# Altium PCB PCB4.PcbDoc (part 2 of 2)
Units mil, origin at the board's own origin, x right, y up, seen from the top; angles counter-clockwise.
Board outline 6000 x 4000 mil, 2 copper layers (Top Layer, Bottom Layer); 67 components, 41 nets, 192 pads, 16 vias.
Unrouted connection lines stored in the file: 1.
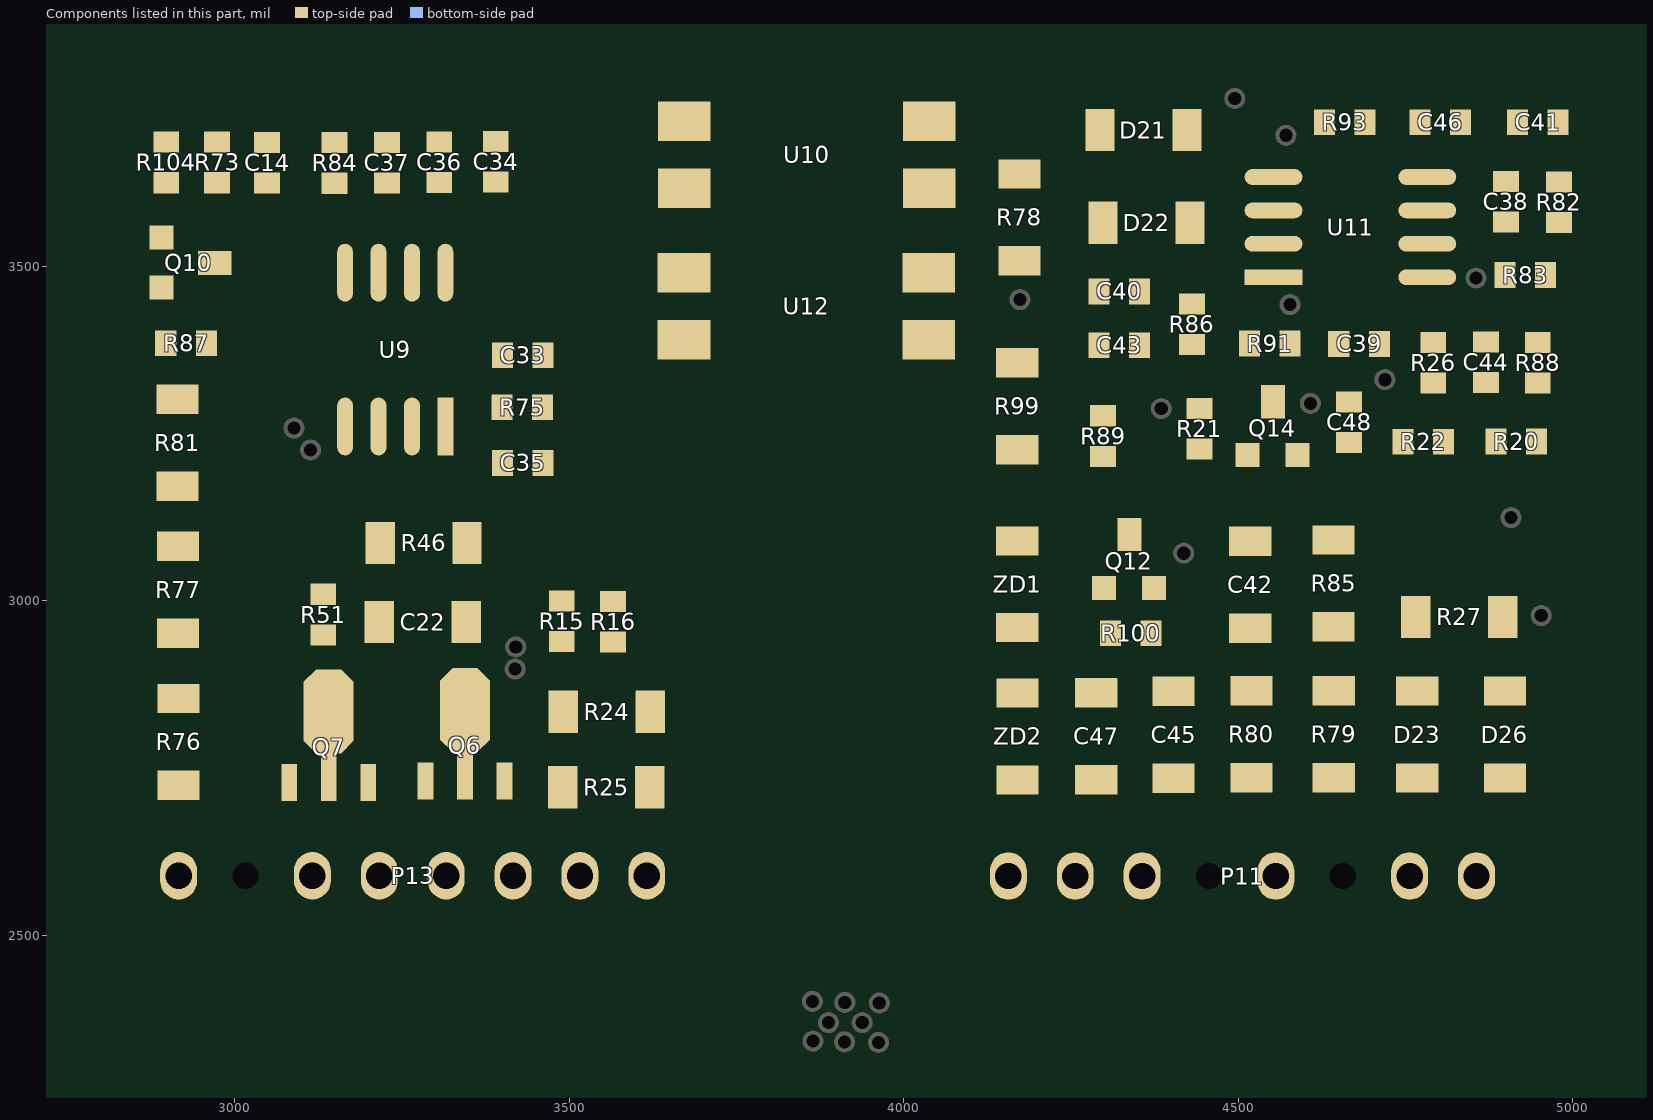
[diagram p2: the components of this part, seen from the top]

## Via types
v1: diameter 19.68, hole 11.81, Top Layer to Bottom Layer, 16 vias

## Nets (pads, with @x,y where several pads share a name; then routed paths per layer and width w, separated by ;. In a path a pad name is that pad's centre, name@x,y a point inside that pad or via, vN(x,y) a via of type N, cw(c..) or ccw(c..) an arc to the next point about the centre after c; other vN are vias at no path point) (continued)
copper on no net: | length 70062.8
  Top Layer w13.78: 4011.89,3376.42 4053.62,3334.68 4053.62,3333.5 ; 4026.46,3396.89 4033.94,3396.89 4060.71,3370.12 4060.71,3336.26 ; 4028.03,3387.83 4060.71,3355.16 4060.71,3179.96 4148.11,3092.56 4165.83,3092.56 ; 4028.43,3370.51 4050.87,3348.07 4050.87,3178.39 4145.35,3083.9 4168.19,3083.9 ; 4059.13,3317.76 4059.13,3353.98 4068.98,3363.82 ; 4218.98,3156.73 4302.44,3156.73 4341.42,3117.76 4341.42,3092.95 4339.45,3090.98 4339.45,3098.46 4282.36,3155.55 ; 4242.6,3529.96 4243.39,3529.96 4254.8,3541.38 4282.36,3541.38 4299.69,3558.7 4299.69,3565.39 ; 4264.25,3549.65 4272.91,3549.65 4274.49,3551.22 ; 4278.43,3567.36 4242.2,3531.14 4242.2,3314.21 4217.01,3289.02 4112.68,3289.02 4097.32,3273.66 4097.32,3184.68 4125.28,3156.73 4287.48,3156.73 4331.18,3113.03 4331.18,3112.64 ; 4288.27,3155.55 4289.45,3156.73 4307.95,3156.73 4343.78,3120.91 ; 4291.81,3467.36 4291.81,3471.3 4361.1,3540.59 4361.1,3609.88 4383.94,3632.72 4460.71,3632.72 4513.07,3580.35 4538.66,3580.35 4541.81,3583.5 4541.81,3584.68 4539.45,3587.05 4505.98,3587.05 ; 4303.23,3140.2 4313.86,3129.57 4313.86,3085.87 4318.19,3081.54 ; 4651.26,3448.86 4651.26,3578.39 4660.71,3587.83 4660.71,3444.92 4662.68,3442.95 4647.32,3442.95 4639.06,3451.22 4639.06,3576.42 4708.35,3645.71 4710.32,3645.71 4720.16,3635.87 4744.96,3635.87 4749.29,3640.2 4722.52,3640.2 4711.89,3650.83 4805.2,3650.83 4805.98,3650.04 4723.7,3650.04 4670.16,3596.5 4670.16,3447.68 4719.37,3398.46 4719.37,3391.77 ; 4681.97,3703.58 4681.97,3685.87 4681.18,3685.08 4687.09,3685.08 4706.38,3704.37 4765.83,3704.37 4771.34,3709.88 4771.34,3726.42 4771.73,3726.81 4696.54,3726.81 4689.84,3720.12 4689.84,3715.39 ; 4703.23,3350.43 4703.23,3406.73 4677.64,3432.32 4646.54,3432.32 4633.15,3445.71 4633.15,3585.87 4709.53,3662.24 4807.17,3662.24 4826.06,3681.14 4826.06,3730.35 4828.03,3732.32 4925.67,3732.32 4926.06,3731.93 4926.06,3688.23 4922.13,3684.29 4871.34,3684.29 4816.61,3629.57 4722.91,3629.57 4682.36,3589.02 4682.36,3447.68 4738.66,3391.38 4748.11,3391.38 ; 4773.31,3534.68 4835.51,3534.68 4857.95,3557.13 4857.95,3599.65 4889.06,3630.75 ; 4787.09,3583.5 4726.85,3583.5 4709.53,3566.18 4709.53,3464.21 4736.69,3437.05 4920.55,3437.05 4958.35,3399.25 4958.35,3387.83 ; 4789.84,3325.63 4790.63,3325.63 4831.18,3285.08 4908.35,3285.08 4945.35,3322.09 4950.87,3322.09 4951.65,3321.3 4951.65,3248.07 4948.9,3245.31 4944.57,3245.31 4939.84,3250.04 4939.84,3261.06 4915.83,3285.08 4893.78,3285.08 ; 4825.67,3654.76 4865.83,3694.92 4917.01,3694.92 4909.13,3702.8 4845.75,3702.8 4843.78,3700.83 4843.78,3684.68 4855.59,3696.5 4855.59,3700.43 4850.47,3705.55 4850.47,3726.81 4850.87,3726.42 4903.62,3726.42 ; 4871.73,3329.17 4882.76,3329.17 4933.15,3379.57 ; 4878.82,3618.94 4971.34,3618.94 4978.82,3626.42 4979.21,3626.42 ; 4916.22,3285.08 4931.57,3285.08 4937.09,3279.57 4937.09,3172.48 4913.86,3149.25 4892.99,3149.25 4891.02,3147.28 4891.02,3115 4896.54,3109.49 4947.72,3109.49 4953.62,3115.39 4953.62,3231.54 ; 4921.73,3287.44 4921.73,3289.41 4941.02,3308.7 4941.02,3271.3 4939.06,3273.27 4939.06,3274.84 4928.03,3285.87 4929.61,3285.87 4934.33,3290.59 ; 4935.91,3380.75 4935.91,3420.12 ; 4941.02,3137.05 4947.32,3130.75 4947.32,3119.33 4935.51,3131.14 4912.68,3131.14 4909.92,3133.9 4928.43,3133.9 4942.2,3147.68 4907.56,3147.68 4898.9,3139.02 4898.9,3124.45 4903.62,3119.72 4937.87,3119.72 4947.72,3129.57 4947.72,3161.46 ; 4941.81,3405.94 4944.57,3403.19 4944.57,3393.35
  Top Layer w19.68: 2857.95,3548.86 2856.77,3548.86 2848.5,3557.13 2848.5,3625.24 2852.05,3628.78 2890.24,3628.78 ; 2875.67,3537.05 2852.44,3537.05 2848.5,3540.98 2848.5,3595.71 2861.89,3609.09 2868.19,3609.09 2877.24,3600.04 2877.24,3563.43 2885.12,3555.55 2885.12,3609.09 2881.97,3612.24 2896.14,3612.24 2902.83,3605.55 2873.31,3605.55 2865.04,3613.82 2865.04,3558.31 2874.09,3549.25 2889.84,3549.25 2896.14,3542.95 2896.14,3585.87 2930,3619.72 2969.37,3619.72 2976.06,3626.42 2978.43,3626.42 2852.44,3626.42 2848.9,3622.87 2848.9,3555.16 2860.71,3543.35 2885.12,3543.35 ; 2877.64,3725.24 2877.64,3703.58 2887.87,3693.35 2861.89,3693.35 2861.5,3693.74 2861.5,3737.05 2859.92,3738.62 2892.6,3738.62 2892.99,3739.02 2892.99,3708.31 2896.54,3704.76 2896.54,3688.23 2890.24,3681.93 2849.29,3681.93 2844.96,3686.26 2844.96,3740.98 2856.38,3752.4 2902.05,3752.4 2909.13,3745.31 2909.13,3691.38 2901.65,3683.9 2894.57,3683.9 ; 2879.61,3600.43 2907.56,3628.39 3048.9,3628.39 3048.5,3628.39 3041.02,3620.91 2980.79,3620.91 ; 2908.35,3312.24 2908.35,3305.16 2921.73,3291.77 2954.8,3291.77 2983.15,3320.12 2983.15,3503.19 2979.61,3499.65 2979.61,3338.62 2945.75,3304.76 2945.75,3318.15 2951.26,3323.66 2951.26,3325.63 2970.16,3344.53 2970.16,3487.83 ; 2910.71,2715.79 2909.13,2715.79 2896.93,2703.58 2896.93,2559.88 2899.29,2557.52 2928.03,2557.52 2935.51,2565 2935.51,2704.76 2922.13,2718.15 2915.04,2718.15 2915.43,2717.76 2915.43,2612.64 2918.58,2609.49 2918.58,2613.43 2920.55,2615.39 2920.55,2717.36 ; 2911.1,3099.65 2917.4,3105.94 2917.4,3155.55 2922.13,3160.28 2925.28,3160.28 2929.21,3156.34 2929.21,3091.77 2919.37,3101.61 2919.37,3170.91 2918.19,3169.72 2905.98,3169.72 2898.11,3161.85 2898.11,3094.92 2917.8,3075.24 2924.09,3075.24 ; 2915.04,2927.99 2915.04,2875.63 2931.97,2858.7 ; 2924.49,2852.8 2911.89,2852.8 2900.47,2864.21 2900.47,2943.74 2901.26,2942.95 2918.58,2942.95 2931.97,2929.57 ; 2956.38,3501.61 2956.38,3383.11 2957.56,3381.93 ; 3040.24,2795.71 3040.24,2789.8 3081.97,2748.07 ; 3040.63,2895.71 3040.63,2798.46 3033.94,2791.77 3033.94,2720.12 3042.99,2711.06 3072.91,2711.06 3047.32,2736.65 3047.32,2745.31 3050.08,2742.56 3050.08,2724.84 ; 3046.93,3379.17 3066.61,3359.49 3215.43,3359.49 3213.86,3357.91 3044.17,3357.91 3057.56,3371.3 3145.35,3371.3 3056.77,3459.88 3062.68,3453.98 3062.68,3431.54 3110.32,3383.9 3091.81,3383.9 3052.05,3423.66 3088.66,3423.66 3127.64,3384.68 3076.85,3384.68 3058.35,3403.19 3058.35,3405.16 3059.13,3404.37 3059.13,3387.05 3063.46,3382.72 ; 3047.32,3693.35 3065.04,3693.35 3094.57,3663.82 3094.57,3575.24 3034.72,3515.39 3034.72,3276.81 3057.17,3254.37 3067.8,3254.37 3126.46,3195.71 3126.46,3183.5 ; 3063.46,3551.61 3098.9,3516.18 3098.9,3436.26 3086.69,3448.46 3086.69,3508.31 3081.57,3513.43 ; 3064.25,3382.32 3064.25,3383.9 3052.83,3395.31 3052.83,3518.15 3086.3,3551.61 3086.3,3539.02 3067.8,3520.51 3067.8,3462.64 3080,3474.84 3080,3501.22 ; 3069.37,3468.94 3164.25,3374.06 3286.69,3374.06 3306.38,3393.74 3306.38,3408.7 3309.92,3412.24 3332.76,3412.24 3363.46,3442.95 3363.46,3498.07 3382.36,3516.97 3698.9,3516.97 3696.93,3515 3696.93,3505.55 3661.89,3470.51 3554.02,3470.51 3526.85,3443.35 3526.85,3211.46 3519.37,3203.98 3464.25,3203.98 3458.35,3209.88 3458.35,3402.4 3440.24,3420.51 3361.5,3420.51 3345.75,3404.76 3345.75,3343.74 3340.24,3338.23 3195.35,3338.23 3166.22,3309.09 3166.22,3266.57 ; 3073.31,3097.28 3073.31,3085.08 3059.53,3071.3 3070.16,3071.3 3090.24,3091.38 3090.24,3088.23 3053.23,3051.22 3053.23,3196.1 3055.59,3198.46 3055.59,3128.78 3099.29,3085.08 3099.29,3080.35 3044.96,3026.02 3044.96,3210.28 3063.86,3229.17 3080.79,3229.17 ; 3079.61,3214.61 3079.61,3114.61 3089.84,3104.37 3108.74,3104.37 3146.54,3142.17 3146.54,3208.31 3148.9,3210.67 3092.2,3210.67 3095.35,3207.52 3095.35,3116.18 3129.21,3150.04 3129.21,3204.76 3109.92,3185.47 3109.92,3136.26 3112.68,3139.02 3112.68,3211.06 ; 3080,2728.78 3080,2731.14 3033.94,2777.2 3033.94,2942.17 3198.11,3106.34 3208.35,3106.34 3212.28,3102.4 3212.28,3101.61 3129.21,3018.54 ; 3093.78,3585.47 3034.72,3526.42 3034.72,3396.1 3079.21,3351.61 3098.9,3351.61 ; 3096.14,3348.07 3089.84,3348.07 3034.72,3292.95 3034.72,3240.2 ; 3102.05,3321.3 3034.72,3253.98 3034.72,2998.86 3166.22,3130.35 3166.22,3159.88 ; 3103.23,3215.39 3115.83,3215.39 ; 3105.98,3377.2 3102.83,3380.35 3102.83,3664.61 3130,3691.77 3142.6,3691.77 3142.2,3691.38 3154.8,3691.38 ; 3106.38,2620.91 3106.38,2645.31 3126.46,2665.39 3126.46,2621.3 3111.5,2606.34 3112.28,2606.34 ; 3116.22,2806.73 3116.22,2800.43 3133.94,2782.72 3133.94,2686.65 3095.35,2648.07 3095.35,2556.73 3097.32,2554.76 3133.94,2554.76 3134.72,2555.55 3134.72,2659.88 3146.14,2671.3 3146.14,2800.04 3145.35,2800.83 ; 3117.4,3361.46 3100.87,3377.99 3100.87,3668.54 3146.54,3714.21 3190.24,3714.21 ; 3125.67,2565.79 3125.67,2624.06 3146.14,2644.53 3146.14,2717.36 3141.42,2722.09 ; 3139.06,2724.06 3139.06,2761.85 3089.84,2811.06 3089.84,2936.26 3107.17,2953.58 3173.7,2953.58 3200.87,2980.75 3202.44,2980.75 3227.64,2955.55 3227.64,2851.22 3141.02,2764.61 3141.02,2759.09 ; 3146.93,3622.87 3163.86,3605.94 3163.86,3486.26 ; 3160.32,3274.84 3160.32,3261.85 3166.61,3255.55 3166.61,3220.91 3165.83,3220.12 3054.8,3220.12 3034.72,3240.2 ; 3166.22,3270.51 3166.22,3140.59 3118.98,3093.35 3070.95,3093.35 3070.95,3203.98 3034.72,3240.2 ; 3181.18,3066.57 3201.26,3066.57 3209.92,3075.24 3209.92,3082.32 ; 3194.17,2703.98 3230.39,2667.76 3375.28,2667.76 3397.32,2689.8 3397.32,2748.46 3412.28,2748.46 3420.16,2740.59 3420.16,2738.62 ; 3200.47,2734.68 3200.47,2715.79 3250.87,2665.39 3382.36,2665.39 3424.09,2707.13 3424.09,2744.53 3420.95,2747.68 3413.86,2747.68 ; 3212.68,2587.44 3223.31,2587.44 3236.3,2600.43 3236.3,2634.69 3264.65,2663.03 3241.81,2663.03 3226.85,2648.07 ; 3214.25,3270.12 3214.25,3214.61 3339.06,3089.8 ; 3215.04,3418.54 3215.04,3614.21 3226.85,3626.02 3228.03,3626.02 ; 3215.04,3478.39 3215.04,3596.1 3233.15,3614.21 ; 3216.22,2582.72 3205.98,2582.72 3196.54,2592.17 3196.54,2744.92 3206.77,2744.92 3207.17,2744.53 3207.17,2666.97 3236.3,2637.83 3236.3,2563.03 3228.03,2554.76 3197.32,2554.76 3196.54,2555.55 3196.54,2644.92 3207.95,2656.34 3207.95,2626.81 3223.7,2611.06 3223.7,2633.9 3217.8,2639.8 ; 3254.02,2764.21 3264.25,2753.98 3264.25,2716.97 3268.19,2713.03 3273.31,2713.03 ; 3254.02,2765.39 3284.72,2734.68 3284.72,2726.02 ; 3263.07,3245.31 3263.07,3215 3305.59,3172.48 3362.28,3172.48 3383.94,3194.13 3387.48,3194.13 3374.49,3181.14 3326.46,3181.14 3320.95,3175.63 3395.35,3175.63 3397.32,3177.6 3397.32,3195.71 ; 3264.25,3420.51 3264.25,3563.43 3311.89,3611.06 3311.89,3620.51 ; 3265.04,3417.76 3265.04,3564.21 3308.35,3607.52 3308.35,3618.94 3302.44,3624.84 3298.5,3624.84 3296.54,3622.87 3296.54,3599.25 ; 3267.01,3259.09 3267.01,3210.67 3292.6,3185.08 3354.8,3185.08 3385.91,3216.18 3406.38,3216.18 3406.77,3215.79 3406.77,3018.54 3359.53,2971.3 3391.81,2971.3 3405.59,2985.08 3405.59,3146.1 3390.24,3161.46 3316.22,3161.46 3282.36,3195.31 ; 3296.93,2820.91 3296.93,2891.77 3339.84,2934.68 3344.96,2934.68 3308.74,2898.46 3308.74,2812.24 3312.68,2808.31 3312.68,2804.76 ; 3305.98,2898.46 3313.86,2898.46 3329.21,2913.82 3329.21,2985.47 3331.97,2988.23 3409.53,2988.23 3454.41,2943.35 3491.42,2943.35 ; 3313.46,3470.91 3313.46,3528.78 3382.76,3598.07 3382.76,3616.57 ; 3313.86,3496.89 3313.86,3528.78 3394.96,3609.88 3628.03,3609.88 3640.24,3597.68 ; 3315.83,3256.73 3315.83,3287.05 3328.82,3300.04 3368.98,3300.04 3395.75,3326.81 3395.75,3372.09 3402.05,3372.09 3404.02,3370.12 3404.02,3290.98 3396.54,3283.5 3366.61,3283.5 3344.96,3261.85 3344.96,3233.5 3339.06,3227.6 3318.58,3227.6 3315.43,3230.75 3315.43,3251.22 3313.07,3253.58 3313.07,3296.89 3316.22,3300.04 3385.91,3300.04 3394.57,3308.7 ; 3316.22,3476.02 3316.22,3531.14 3413.86,3628.78 3674.49,3628.78 3673.7,3629.57 3402.44,3629.57 ; 3318.58,2802.8 3318.58,2794.13 3338.27,2774.45 3338.27,2709.88 3339.84,2708.31 3348.9,2708.31 3348.9,2765.39 3433.54,2850.04 3433.54,2885.47 3459.92,2911.85 3487.09,2911.85 3495.35,2920.12 3495.35,2933.5 ; 3325.67,3373.27 3325.67,3381.93 3370.16,3426.42 ; 3338.27,2950.43 3288.66,2900.83 3288.66,2816.18 3342.99,2761.85 3342.99,2727.2 ; 3342.99,3278.39 3342.99,3250.04 3329.61,3236.65 3329.61,3291.77 3330,3292.17 3359.13,3292.17 ; 3364.25,3438.62 3364.25,3523.27 3405.2,3564.21 3578.82,3564.21 3643.39,3499.65 3651.65,3499.65 ; 3376.46,2824.84 3376.46,2830.35 3404.41,2858.31 3404.41,2883.11 3403.62,2882.32 3374.09,2882.32 3384.33,2872.09 3384.33,2847.68 3392.6,2855.94 3392.6,2871.3 ; 3378.03,2813.43 3378.82,2813.43 3417.8,2852.4 3417.8,2881.54 3462.68,2926.42 3480.79,2926.42 3476.85,2930.35 3468.19,2930.35 3467.8,2929.96 3354.02,2929.96 3319.37,2895.31 3423.31,2895.31 3450.47,2922.48 3338.66,2922.48 3328.03,2911.85 3335.12,2911.85 3335.51,2912.24 3422.13,2912.24 ; 3402.44,3181.54 3434.33,3149.65 3434.33,2968.15 3470.16,2932.32 3481.18,2932.32 ; 3403.23,2955.55 3405.98,2955.55 3410.32,2951.22 3371.73,2951.22 3370.95,2950.43 3370.95,2962.64 3363.07,2970.51 3405.98,2970.51 3438.27,2938.23 3445.75,2938.23 ; 3412.68,3155.16 3413.07,3155.16 3418.98,3149.25 3418.98,2986.65 ; 3418.58,2592.95 3418.58,2613.03 3500.87,2695.31 ; 3439.06,2636.26 3435.12,2632.32 3435.12,2558.7 3431.18,2554.76 3395.75,2554.76 3394.96,2555.55 3394.96,2620.12 3491.02,2716.18 3491.02,2718.15 ; 3456.38,3195.71 3515.83,3136.26 3632.36,3136.26 3651.65,3155.55 3651.65,3313.82 3638.66,3326.81 3547.72,3326.81 3505.59,3368.94 3505.59,3388.23 ; 3470.55,3728.78 3470.55,3715 3502.83,3682.72 3613.07,3682.72 3628.82,3698.46 3679.21,3698.46 ; 3482.76,3218.94 3482.76,3192.95 3523.7,3152.01 3631.18,3152.01 3642.2,3163.03 3642.2,3301.22 3629.21,3314.21 3533.54,3314.21 3501.26,3281.93 3501.26,3174.06 3516.61,3158.7 3517.4,3158.7 3524.88,3166.18 3524.88,3224.84 3511.5,3211.46 3511.5,3164.61 3511.1,3165 ; 3489.06,3075.24 3563.86,3075.24 3565.43,3073.66 3565.43,3048.46 3573.31,3040.59 3573.31,3083.9 3569.76,3087.44 3484.72,3087.44 3480.79,3083.5 3480.79,3026.81 3485.91,3021.69 3499.69,3021.69 3491.42,3029.96 3482.36,3029.96 3482.76,3029.57 3502.83,3029.57 ; 3489.84,3020.51 3489.84,3005.55 3500.87,2994.53 3561.5,2994.53 ; 3490.63,2827.99 3490.63,2859.88 3562.28,2931.54 ; 3493.39,2729.17 3492.99,2729.17 3481.18,2740.98 3481.18,2824.06 3483.54,2826.42 3492.99,2826.42 3498.11,2821.3 3498.11,2740.59 ; 3498.11,2833.9 3498.11,2859.09 3566.61,2927.6 ; 3500.47,3024.45 3556.38,3024.45 3561.89,3029.96 3561.89,3041.38 3561.5,3041.77 3504.8,3041.77 3504.41,3041.38 3499.29,3041.38 3494.96,3037.05 3494.96,3014.61 3491.81,3011.46 3565.83,3011.46 3573.31,3003.98 3573.31,3050.83 3567.01,3057.13 3492.2,3057.13 3480.79,3045.71 3480.79,2998.46 3480,2997.68 3566.61,2997.68 3567.01,2998.07 3567.01,2998.46 ; 3517.01,2596.1 3517.01,2610.28 3628.82,2722.09 3628.82,2812.24 3625.28,2815.79 3618.58,2815.79 3613.07,2810.28 3613.07,2715.79 ; 3592.99,2681.54 3624.88,2681.54 3641.02,2697.68 3641.02,2861.06 3637.87,2864.21 3605.98,2864.21 3604.8,2863.03 3604.8,2707.91 3495.75,2598.86 3495.75,2561.85 3502.44,2555.16 3535.51,2555.16 3535.91,2554.76 3535.91,2623.27 3623.7,2711.06 3625.28,2711.06 ; 3594.96,3703.98 3609.92,3718.94 3609.92,3719.72 ; 3597.32,3685.87 3613.46,3702.01 3642.6,3702.01 3633.54,3711.06 3633.54,3729.57 3630.39,3732.72 ; 3598.5,2617.76 3594.96,2614.21 3594.96,2565 3600.08,2559.88 3631.97,2559.88 3636.69,2564.61 3636.69,2618.15 3635.91,2618.94 3600.08,2618.94 3595.75,2614.61 3595.75,2574.06 3604.02,2565.79 3608.74,2565.79 ; 3610.32,3684.29 3625.67,3699.65 3642.99,3699.65 ; 3634.33,3384.68 3576.85,3384.68 3574.88,3386.65 3574.88,3396.5 3573.31,3398.07 3625.67,3398.07 3631.97,3391.77 3631.97,3383.5 3644.17,3371.3 3573.31,3371.3 3565.83,3378.78 3565.83,3406.73 3565.83,3413.03 3571.73,3418.94 3574.88,3418.94 3584.72,3409.09 3646.54,3409.09 3665.83,3389.8 3665.83,3382.72 ; 3646.14,3714.21 3648.5,3716.57 ; 3657.56,3715 3675.28,3715 3682.76,3707.52 3694.17,3707.52 3700.87,3714.21 3700.87,3744.92 3694.57,3751.22 ; 4031.57,3610.67 4031.57,3615 4049.29,3632.72 4133.15,3632.72 4148.5,3648.07 4162.28,3648.07 4165.83,3644.53 4165.83,3639.8 4154.8,3628.78 4146.54,3628.78 4122.91,3605.16 4041.02,3605.16 4035.51,3610.67 4110.31,3610.67 4120.94,3621.3 ; 4035.12,3702.01 4265.83,3702.01 4289.45,3678.39 4289.45,3584.29 4304.8,3568.94 4308.35,3572.48 4308.35,3728.78 4304.8,3732.32 4050.08,3732.32 4035.91,3718.15 4035.91,3710.28 ; 4036.3,3620.91 4102.83,3620.91 4104.02,3622.09 4116.61,3622.09 ; 4037.87,3718.15 4266.61,3718.15 4273.31,3711.46 ; 4044.17,3483.5 4070.16,3483.5 4185.51,3368.15 4185.51,3360.67 4179.61,3354.76 4159.92,3354.76 4152.05,3362.64 4152.05,3393.35 ; 4060.71,3614.21 4096.54,3614.21 4131.97,3649.65 4167.01,3649.65 ; 4157.17,3711.46 4239.84,3711.46 4279.61,3671.69 4279.61,3544.13 4280.39,3543.35 ; 4162.28,2726.02 4162.28,2732.32 4174.09,2744.13 4776.85,2744.13 4778.82,2742.17 ; 4170.55,3453.19 4170.55,3476.42 4152.05,3494.92 4152.05,3459.09 4170.55,3440.59 4183.54,3440.59 4192.99,3450.04 4192.99,3502.01 4178.82,3487.83 4178.82,3456.73 ; 4177.24,3233.9 4177.24,3229.96 4187.87,3219.33 4289.84,3219.33 4286.69,3216.18 4183.15,3216.18 ; 4206.38,3717.76 4238.66,3717.76 4298.9,3657.52 ; 4268.58,2875.24 4301.65,2908.31 4301.65,3018.94 ; 4279.21,2867.36 4286.69,2867.36 4292.99,2873.66 4292.99,2998.46 4305.98,3011.46 4305.98,3006.73 4299.69,3013.03 4299.69,3022.87 ; 4293.39,3272.48 4293.39,3465.39 ; 4293.78,3213.43 4313.86,3213.43 4421.34,3105.94 4421.34,3072.87 ; 4294.57,3277.6 4310.31,3277.6 4506.38,3081.54 4633.54,3081.54 4639.06,3087.05 4639.06,3093.35 4637.87,3094.53 4529.21,3094.53 ; 4295.75,2875.63 4301.65,2881.54 4301.65,3017.76 ; 4300.87,2871.69 4305.59,2876.42 4305.59,3013.43 4300.87,3018.15 ; 4352.83,3463.82 4400.87,3463.82 4422.13,3442.56 ; 4353.23,3466.57 4362.28,3466.57 4416.61,3520.91 4416.61,3546.1 ; 4355.2,3381.54 4432.76,3381.54 ; 4370.55,3022.09 4384.72,3022.09 4427.64,3065 ; 4374.09,3020.51 4376.06,3020.51 4424.88,3069.33 4424.88,3072.48 4376.46,3024.06 4376.46,3023.27 ; 4375.28,3020.51 4409.92,3055.16 4409.92,3077.2 4413.86,3081.14 4422.13,3081.14 4427.64,3075.63 4427.64,3065 ; 4378.43,3029.57 4389.45,3029.57 4409.92,3050.04 4409.92,3114.21 ; 4381.57,3019.33 4424.49,3062.24 4424.88,3062.24 4427.64,3065 ; 4382.76,2947.28 4382.76,2932.32 4421.34,2893.74 4421.34,2879.17 ; 4385.91,2919.72 4385.91,2908.7 4407.56,2887.05 ; 4385.91,3025.63 4385.91,2929.17 4415.43,2899.65 4415.43,2868.54 ; 4401.26,2863.82 4398.9,2863.82 4382.36,2880.35 4382.36,2919.33 4369.37,2932.32 4369.37,3008.31 4376.06,3015 4381.18,3015 4384.72,3011.46 4384.72,2897.68 4411.89,2870.51 ; 4412.28,3484.29 4419.37,3491.38 4419.37,3507.91 4390.24,3478.78 4402.83,3478.78 4437.48,3444.13 4437.48,3516.57 4452.83,3531.93 4552.05,3531.93 4554.8,3534.68 4555.98,3534.68 ; 4419.37,3107.91 4427.64,3099.65 4427.64,3065 ; 4426.46,3453.58 4426.46,3563.03 4426.06,3563.43 4451.26,3563.43 4481.97,3532.72 4560.32,3532.72 ; 4426.46,3532.32 4428.03,3533.9 4558.35,3533.9 ; 4427.64,3578.78 4438.66,3578.78 4482.76,3534.68 ; 4430.79,3697.68 4430.79,3710.28 4481.18,3760.67 4505.2,3760.67 4506.38,3759.49 4506.38,3745.71 4500.08,3739.41 4484.72,3739.41 4437.09,3691.77 ; 4433.94,3284.29 4397.72,3284.29 4389.06,3275.63 4381.97,3275.63 4374.09,3283.5 4374.09,3297.28 4376.46,3299.65 4396.93,3299.65 4405.2,3291.38 4439.45,3291.38 4444.96,3285.87 ; 4437.09,3218.54 4450.08,3205.55 4732.36,3205.55 4749.29,3222.48 4749.29,3233.5 4747.32,3235.47 4701.26,3235.47 4690.63,3224.84 4678.03,3224.84 ; 4441.02,3229.17 4492.2,3229.17 4498.5,3222.87 4615.04,3222.87 4629.21,3237.05 4666.61,3237.05 4668.98,3239.41 4744.57,3239.41 4748.9,3235.08 4748.9,3224.84 4735.91,3211.85 4498.11,3211.85 4488.66,3221.3 4450.08,3221.3 4442.2,3229.17 4441.81,3229.17 ; 4446.14,3228.39 4445.35,3228.39 4448.5,3231.54 4495.35,3231.54 4498.5,3228.39 4625.28,3228.39 ; 4448.11,3228.78 4483.15,3228.78 4494.17,3239.8 4494.17,3357.13 4513.86,3376.81 ; 4448.5,3550.04 4452.05,3546.5 4452.05,3545.71 ; 4497.72,3238.23 4517.01,3218.94 4554.41,3218.94 ; 4502.44,2956.73 4502.44,2879.57 4519.76,2862.24 4521.34,2862.24 ; 4529.21,3479.96 4575.28,3479.96 4588.27,3466.97 4588.27,3423.66 4621.34,3390.59 4647.32,3390.59 4649.29,3388.62 4649.29,3381.54 4644.17,3376.42 4574.49,3376.42 4572.52,3378.39 4572.52,3439.8 4557.56,3454.76 4527.64,3454.76 4520.55,3461.85 4520.55,3473.66 4536.3,3457.91 4573.7,3457.91 4560.32,3471.3 4531.57,3471.3 ; 4533.54,3470.12 4535.51,3470.12 4602.83,3402.8 4602.83,3389.41 4585.12,3407.13 4580,3407.13 ; 4543.39,3633.5 4631.57,3633.5 4690.63,3692.56 4690.63,3702.01 4702.05,3713.43 4770.16,3713.43 ; 4546.54,3285.08 4619.37,3285.08 4626.85,3292.56 4714.25,3292.56 4731.97,3310.28 4731.97,3356.34 4757.17,3381.54 4866.22,3381.54 4875.28,3390.59 4875.67,3390.59 ; 4547.32,3302.4 4548.9,3302.4 4556.77,3310.28 4663.46,3310.28 4707.56,3354.37 4707.56,3373.66 ; 4550.87,3287.83 4550.87,3299.25 4556.77,3305.16 4679.21,3305.16 4709.53,3335.47 4709.53,3380.35 ; 4554.8,3294.13 4695.35,3294.13 4718.19,3316.97 ; 4572.52,3711.85 4574.88,3714.21 4591.42,3714.21 ; 4589.84,3485.08 4590.24,3484.68 4590.24,3402.01 4587.09,3398.86 4603.62,3398.86 ; 4614.65,3223.27 4727.24,3223.27 4729.61,3225.63 ; 4622.13,3710.28 4594.57,3710.28 4582.36,3698.07 4582.36,3688.62 4578.82,3685.08 4563.07,3685.08 4556.77,3691.38 4556.77,3705.55 4572.91,3721.69 4626.06,3721.69 4628.03,3719.72 4628.03,3714.21 ; 4623.31,3218.15 4623.31,3216.18 4633.94,3205.55 4737.09,3205.55 4745.75,3196.89 ; 4670.94,3230.75 4670.94,3231.14 4675.28,3235.47 4741.81,3235.47 4751.65,3225.63 4751.65,3022.09 4775.67,2998.07 ; 4674.09,3222.09 4731.18,3222.09 4749.29,3203.98 4749.29,2957.52 4752.05,2954.76 ; 4706.77,3341.77 4706.77,3352.8 4744.17,3390.2 4865.43,3390.2 ; 4714.65,3390.59 4865.04,3390.59 4866.22,3389.41 4866.22,3389.02 ; 4725.67,3221.3 4728.43,3221.3 ; 4750.47,3478.39 4756.77,3472.09 4862.68,3472.09 4871.34,3480.75 4894.17,3480.75 4901.26,3487.83 4901.26,3494.53 4901.65,3494.92 4848.9,3494.92 4838.27,3484.29 4788.27,3484.29 ; 4752.05,2592.56 4757.56,2592.56 4894.96,2729.96 ; 4761.1,2866.57 4778.03,2866.57 4783.15,2861.46 4825.28,2861.46 ; 4773.31,3634.68 4800.08,3634.68 4832.76,3667.36 4832.76,3710.28 4837.87,3715.39 4913.07,3715.39 ; 4777.24,3479.17 4781.97,3479.17 4789.06,3472.09 4902.83,3472.09 4904.02,3473.27 ; 4778.03,2611.06 4775.67,2608.7 4775.67,2559.49 4771.73,2555.55 4737.87,2555.55 4736.3,2557.13 4736.3,2611.46 4741.81,2616.97 4781.97,2616.97 4894.96,2729.96 ; 4781.57,2870.51 4815.83,2870.51 ; 4802.05,2870.51 4816.22,2870.51 4830,2884.29 ; 4804.8,3225.63 4830,3200.43 4830,3183.5 ; 4805.2,3226.81 4812.28,3233.9 4841.81,3233.9 ; 4807.95,3235.87 4814.25,3235.87 4830,3220.12 4830,2903.58 4799.69,2873.27 4885.91,2873.27 4888.27,2870.91 4858.74,2870.91 4831.57,2898.07 ; 4830.39,3200.83 4863.07,3233.5 4882.36,3233.5 ; 4851.26,2596.89 4851.26,2593.74 4856.38,2588.62 4998.9,2588.62 ; 4852.83,3242.56 4885.91,3242.56 4884.72,3243.74 4809.13,3243.74 4804.02,3238.62 4804.02,3232.72 4805.98,3230.75 4880.79,3230.75 ; 4890.63,2588.62 4878.03,2576.02 4878.03,2559.88 4873.31,2555.16 4838.27,2555.16 4837.09,2556.34 4837.09,2605.94 4848.9,2617.76 4865.04,2617.76 4894.17,2588.62 4998.9,2588.62 ; 4899.69,3558.7 4905.59,3558.7 4962.28,3502.01 ; 4900.08,2860.67 4900.08,2865.39 4890.24,2855.55 4770.55,2855.55 4770.55,2863.03 4780,2872.48 4915.04,2872.48 ; 4906.77,3629.96 4979.61,3629.96 4976.46,3633.11 4976.46,3711.85 ; 4986.3,3566.57 5018.98,3533.9 5018.98,2608.7 ; 5018.98,2659.49 5018.98,2608.7 ; 4894.96,2729.96 4903.62,2729.96 4894.96,2729.96 ; 4998.9,2588.62 5018.98,2608.7 ; 4998.9,2588.62 5018.98,2608.7
  Top Layer w39.37: 2987.87,3715.79 3430,3715.79 3432.36,3718.15 ; 3679.21,3717.36 3679.21,3715.79 3669.76,3725.24 3638.27,3725.24 3605.59,3692.56 2978.43,3692.56 2975.28,3695.71 2975.28,3738.23 2977.64,3740.59 3689.84,3740.59 3691.02,3739.41 ; 4505.98,2716.18 4546.54,2675.63 4546.54,2566.57 4549.29,2563.82 4561.89,2563.82 4565.04,2566.97 4565.04,2687.44 4593.78,2716.18 4769.76,2716.18 4774.88,2721.3 4774.88,2722.48 4773.7,2723.66 4773.7,2731.54 4772.91,2732.32 4174.09,2732.32 4158.35,2716.57 4158.35,2715.79 4160.71,2713.43 4544.57,2713.43 4547.72,2710.28 4547.72,2577.2 4550.87,2574.06 4562.28,2574.06 ; 4903.62,2975.63 4953.23,2975.63
  Bottom Layer w13.78: 4941.42,3627.2 4941.42,3229.57 4861.1,3149.25 4861.1,3096.5 4880.39,3077.2 4941.02,3077.2 4953.23,3065 4953.23,2982.72
  Bottom Layer w19.68: 2849.69,3686.26 2849.69,3733.5 2870.55,3754.37 3618.58,3754.37 3657.56,3715.39 3657.56,3017.36 3642.6,3002.4 3350.87,3002.4 3313.86,2965.39 3313.86,2626.02 3295.35,2607.52 3295.35,2565 3300.47,2559.88 3331.18,2559.88 3335.91,2564.61 3335.91,2609.49 3318.98,2626.42 ; 2959.13,3437.05 2959.13,3438.23 2985.51,3464.61 3559.53,3464.61 3571.34,3452.8 3571.34,3413.03 ; 3049.29,2763.03 3050.87,2764.61 3255.98,2764.61 ; 3111.5,2546.89 3111.5,2549.25 3109.13,2551.61 3105.59,2551.61 3101.26,2555.94 3101.26,2537.44 3122.13,2516.57 3122.13,2550.83 3122.91,2551.61 3122.91,2553.19 3122.91,2573.66 3118.98,2577.6 3118.98,2577.2 3133.54,2562.64 3133.54,2612.64 3130.79,2615.39 3100.08,2615.39 3095.35,2610.67 3095.35,2531.93 3139.45,2487.83 3519.76,2487.83 3537.09,2505.16 3537.09,2606.34 3530.79,2612.64 3505.2,2612.64 3496.93,2604.37 3496.93,2515.79 3484.72,2503.58 3150.87,2503.58 3133.54,2520.91 3133.54,2572.48 3121.34,2584.68 3121.34,2590.59 ; 3214.65,3420.12 3214.65,3102.4 3234.72,3082.32 3505.2,3082.32 ; 3473.7,2493.35 3496.54,2493.35 3512.68,2509.49 3512.68,2563.82 3515.04,2561.46 3522.91,2561.46 3517.4,2555.94 3517.4,2497.28 ; 3502.44,2585.08 3505.98,2588.62 ; 3518.19,2573.66 3518.19,2596.89 3561.5,2640.2 3561.5,2642.17 3552.44,2651.22 3548.5,2647.28 3548.5,2637.83 ; 4155.2,2580.35 4155.2,3434.29 4170.55,3449.65 4568.98,3449.65 4578.43,3440.2 ; 4159.13,2570.91 4146.54,2570.91 4145.35,2572.09 4145.35,2572.87 4135.91,2582.32 4135.91,2614.61 4154.8,2633.5 4154.8,2633.11 4176.46,2611.46 ; 4247.32,2611.46 4255.2,2619.33 4255.2,2637.05 4255.98,2637.83 4256.77,2637.83 4276.85,2617.76 4276.85,2608.31 ; 4254.41,2579.57 4248.5,2579.57 4235.91,2592.17 4235.91,2619.72 4255.2,2639.02 4255.2,2633.5 4275.67,2613.03 ; 4256.38,2582.72 4256.38,3270.12 4272.52,3286.26 4385.12,3286.26 4381.97,3289.41 4381.97,3346.1 4400.87,3365 4619.76,3365 4671.34,3416.57 4671.34,3662.64 4638.66,3695.31 4571.73,3695.31 ; 4351.65,2594.92 4351.26,2594.92 4336.3,2579.96 4336.3,2557.91 4354.41,2539.8 4357.17,2539.8 4377.24,2559.88 4377.24,2572.87 ; 4355.98,2585.08 4355.98,2492.95 4370.55,2478.39 5000.47,2478.39 5018.19,2496.1 5018.19,3098.07 4992.2,3124.06 4909.53,3124.06 ; 4500.08,3749.65 4500.08,3756.34 4519.76,3776.02 4834.72,3776.02 4855.2,3755.55 4855.2,3484.68
  Bottom Layer w27.56: 3412.28,2933.9 3408.35,2929.96 3408.35,2905.55 3408.35,2900.04 3414.65,2893.74 3430,2893.74 3443.78,2907.52 3443.78,2910.67 3420.55,2933.9 3412.68,2933.9 3409.13,2930.35 3409.13,2904.76 3416.61,2897.28 3417.4,2897.28 ; 3413.46,2907.13 3592.6,2907.13 3615.43,2884.29 3615.43,2626.02 3599.29,2609.88 3599.29,2567.36 3602.44,2564.21 3628.82,2564.21 3632.76,2568.15 3632.76,2612.64 3618.98,2626.42
  Bottom Layer w39.37: 4174.09,3447.28 4174.09,3447.68 ; 4384.33,3286.26 4385.12,3286.26 ; 4494.96,3750.83 4494.96,3752.01 ; 4571.34,3693.35 4571.34,3694.13 ; 4576.85,3442.56 4577.24,3442.17 ; 4855.59,3480.75 4855.59,3481.54 ; 4906.77,3122.09 4906.77,3123.27 ; 4941.81,3626.81 4941.81,3627.2
  Bottom Layer w47.24: 4172.91,3448.86 4173.31,3448.86 ; 4385.12,3286.26 4385.51,3286.26 ; 4494.96,3750.04 4494.96,3750.43 ; 4570.55,3694.53 4570.55,3694.92 ; 4577.24,3442.17 4577.64,3442.17 ; 4856.38,3482.72 4856.38,3483.11 ; 4906.77,3123.66 4906.77,3124.06 ; 4952.83,2977.2 4953.23,2977.2
  Bottom Layer w59.06: 4724.88,3322.09 4755.59,3291.38 4755.59,2594.53

## Polygon pours and split planes (outlines as drawn)
GND on Bottom Layer "Bottom Layer-No Net" (solid, remove dead copper, pour order 1000): 2802.83,3573.66 2802.83,3774.05 2816.61,3787.83 2826.46,3797.68 2883.94,3797.68 3683.15,3797.68 3698.11,3782.72 3700.87,3779.96 3700.87,3643.74 3700.87,3032.32 3635.51,2966.97 3584.33,2915.79 3584.33,2519.72 3550.47,2485.87 3115.43,2485.87 3086.3,2515 3086.3,2617.76 3086.3,2666.18 3077.64,2674.84 3070.16,2682.32 2905.98,2682.32 2820.94,2682.32 2804.02,2699.25 2802.83,2700.43 2802.83,3573.66
GND2 on Bottom Layer "Bottom Layer-No Net" (solid, remove dead copper, pour order 1000): 4119.33,2693.71 5044.92,2693.71 5046.1,2694.9 5046.1,3782.3 5033.9,3794.5 5032.72,3795.68 4923.66,3795.68 4027.6,3795.68 4024.45,3792.53 4020.51,3788.6 4020.51,3731.12 4020.51,3353.95 4039.41,3335.05 4039.41,3170.09 4122.48,3087.02 4115.4,3079.93 4115.4,2703.56 4115.4,2697.65 4119.33,2693.71

## Keep-outs
Keep-Out Layer:
  lines w3.94: 2771.73,2479.96 ccw(c2821.73,2479.96) 2821.73,2429.96 ; 2771.73,3757.91 cw(c2821.73,3757.91) 2821.73,3807.91 ; 3835.51,2429.96 2771.73,2429.96 2771.73,3807.91 5055.59,3807.91 5055.59,2429.57 3994.57,2429.57 ; 3835.91,2429.17 3835.91,2313.03 3837.48,2311.46 3993.39,2311.46 3993.78,2311.85 3993.78,2429.17 ; 5005.59,2429.57 ccw(c5005.59,2479.57) 5055.59,2479.57 ; 5005.59,3807.91 cw(c5005.59,3757.91) 5055.59,3757.91

## Other copper
Top Layer:
  rectangle: 3839.06,2313.82 3991.42,2429.17
  rectangle net GND: 3517.8,3149.65 3639.84,3314.21
  rectangle net NetR76_1: 2853.62,2831.54 2899.29,2973.27
  rectangle net NetR77_1: 2851.65,3059.09 2898.5,3193.35
  rectangle net CJCS: 3501.65,3038.23 3511.89,3082.72
  rectangle net GND: 3095.75,2845.71 3224.49,2948.46
  rectangle net GND: 3092.99,2803.58 3113.86,2852.01
  rectangle net GND: 3170.16,2819.33 3204.02,2866.18
  rectangle net GND: 3201.65,2836.65 3211.1,2850.83
  rectangle net GND: 3173.31,2811.46 3181.57,2826.02
  rectangle net GND: 3187.09,2947.28 3196.54,2962.24
  rectangle net NetQ6_2: 3100.08,2995.71 3120.95,3009.09
  rectangle net GND: 3459.53,3207.13 3525.67,3515.39
  rectangle net GND: 3476.06,3473.27 3651.65,3509.09
  rectangle net GND: 3367.01,3418.94 3483.15,3512.24
  rectangle net GND: 3453.62,3413.03 3469.76,3423.66
  rectangle net GND: 3508.35,3453.98 3540.63,3477.99
  rectangle net GND: 3537.48,3464.21 3546.93,3476.42
  rectangle net GND: 3396.54,3515.39 3583.15,3556.73
  rectangle net GND: 3574.88,3520.51 3602.44,3539.41
  rectangle net GND: 3579.21,3533.5 3595.35,3547.68
  rectangle net GND: 3379.21,3516.97 3404.41,3544.53
  rectangle net GND: 3213.86,3340.2 3344.57,3374.06
  rectangle net GND: 3304.41,3348.46 3348.11,3407.13
  rectangle net GND: 3292.99,3366.97 3309.53,3383.9
  rectangle net GND: 3039.84,3244.53 3167.4,3355.16
  rectangle net GND: 3162.28,3322.09 3187.48,3348.86
  rectangle net GND: 3051.65,3223.27 3157.95,3252.4
  rectangle net GND: 3041.02,3233.11 3061.1,3249.65
  rectangle net NetZD1_2: 4140.63,2863.43 4197.72,2965.79
  rectangle net NetC42_2: 4492.6,2859.49 4543.39,2944.92
  rectangle net NetR79_1: 4614.25,2866.97 4670.94,2947.28
Bottom Layer:
  rectangle: 3839.06,2313.82 3991.42,2429.17
  rectangle net GND: 3518.19,2637.05 3570.16,2683.9
  rectangle net GND: 3086.3,2585.87 3143.39,2650.43
  rectangle net GND: 3042.99,3176.81 3141.02,3354.76
  rectangle net GND2: 4677.24,3277.6 4778.82,3372.87
  rectangle net GND: 3488.27,2545.31 3541.81,2677.99

## Silkscreen, mask and mechanical layers (free items; w line width, h text height)
Top Overlay:
  rectangle: 2865.83,2542.17 3668.58,2634.68
  rectangle: 4105.2,2540.2 4909.92,2635.87
  text "400V" at 2877.24,2484.69 h39.37
  text "GND" at 3083.94,2483.9 h39.37
  text "输出电流" at 4828.03,2482.32 h39.37
  text "驱动" at 3186.3,2480.75 h39.37
  text "GND" at 4700.87,2481.14 h39.37
  text "过温" at 3283.54,2480.35 h39.37
  text "CS-" at 3488.27,2479.57 h39.37
  text "13V" at 3587.09,2479.57 h39.37
  text "10V" at 4126.85,2479.57 h39.37
  text "CV" at 4231.18,2480.35 h39.37
  text "CC" at 4330,2480.35 h39.37
  text "VOUT" at 4507.17,2479.96 h39.37
  text "CS+" at 3387.87,2478.39 h39.37
Bottom Overlay:
  rectangle: 2863.86,2541.38 3667.8,2636.26
  rectangle: 4105.2,2540.59 4909.53,2635.87
  text "CS+" at 3388.27,2513.03 h39.37 r180
  text "CS-" at 3488.66,2511.85 h39.37 r180
  text "13V" at 3587.48,2511.85 h39.37 r180
  text "驱动" at 3186.69,2510.67 h39.37 r180
  text "过温" at 3283.94,2511.06 h39.37 r180
  text "GND" at 3084.33,2507.52 h39.37 r180
  text "400V" at 2877.64,2506.73 h39.37 r180
  text "VOUT" at 4507.95,2506.73 h39.37 r180
  text "输出电流" at 4828.82,2506.73 h39.37 r180
  text "10V" at 4126.85,2506.34 h39.37 r180
  text "CV" at 4231.57,2506.34 h39.37 r180
  text "CC" at 4331.18,2505.94 h39.37 r180
  text "GND" at 4702.05,2505.94 h39.37 r180
Top Solder:
  rectangle: 3839.06,2313.82 3991.42,2429.17
Bottom Solder:
  rectangle: 3839.06,2313.82 3991.42,2429.17